# Altium PCB Main.PcbDoc
Units mm, origin at the board's own origin, x right, y up, seen from the top; angles counter-clockwise.
Board outline 152.4 x 101.6 mm, 2 copper layers (Top Layer, Bottom Layer); 69 components, 53 nets, 221 pads, 0 vias.
Unrouted connection lines stored in the file: 165.
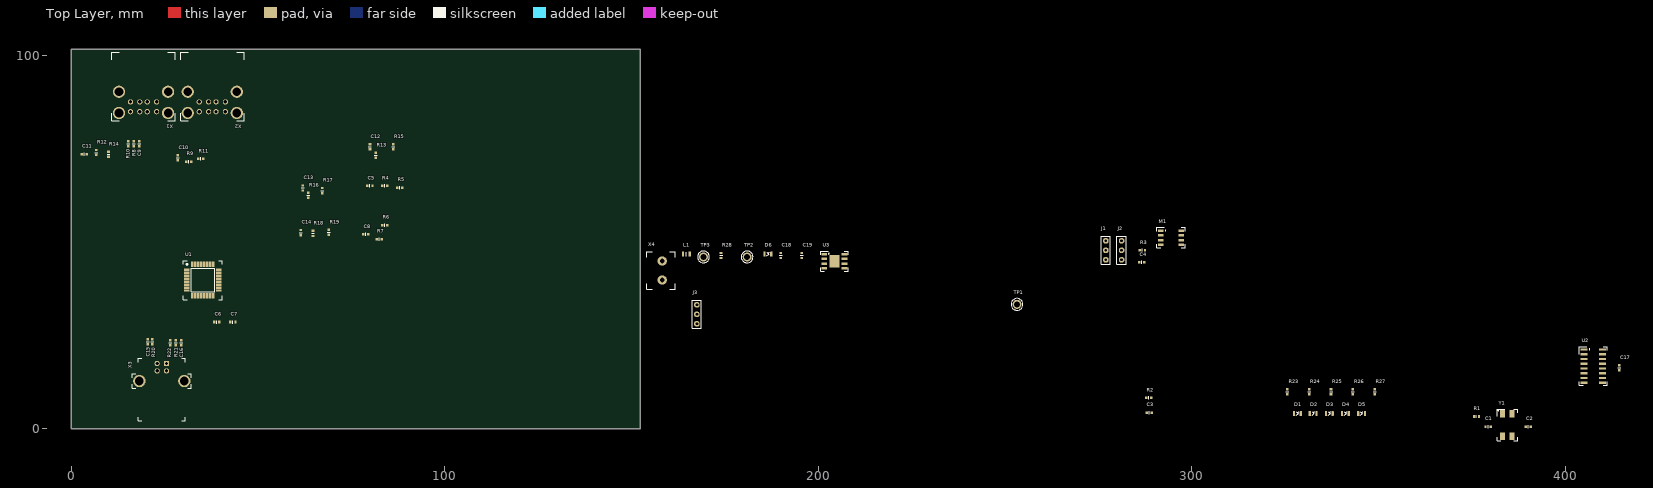
[diagram p0: Top Layer view]
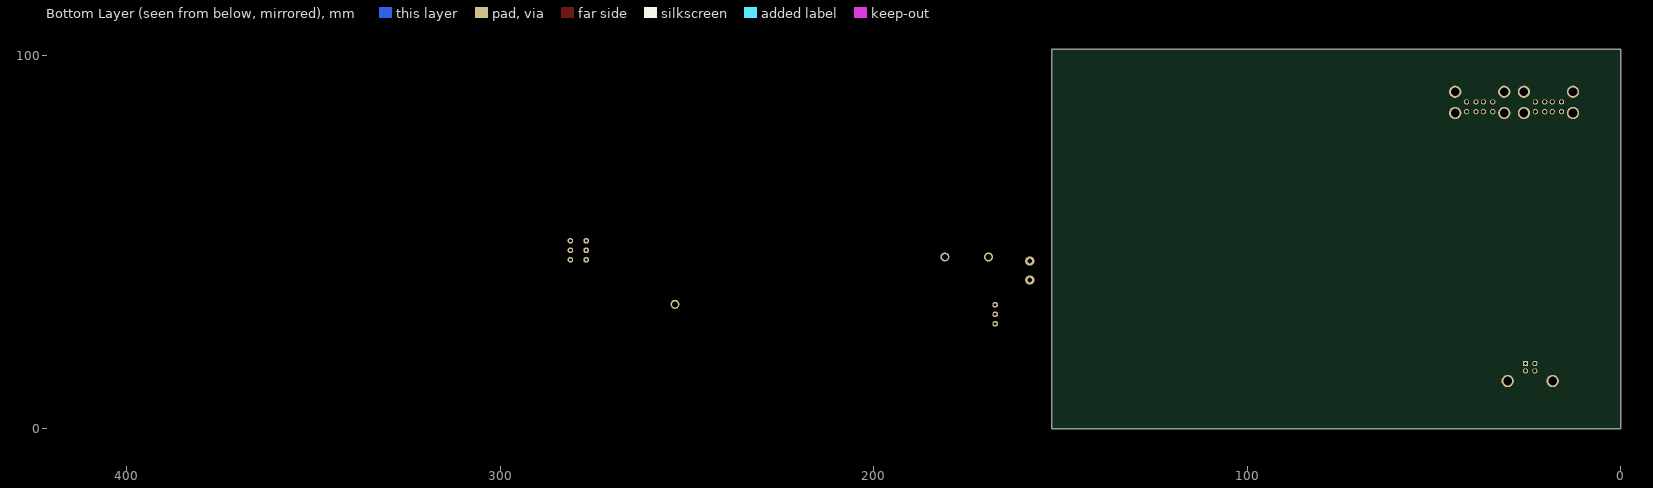
[diagram p1: Bottom Layer view, seen from below]

## Layer stack, top to bottom
Top Solder: solder mask 0.0102, Solder Resist, Dk 3.5
Top Layer: signal copper 0.0356
Dielectric 1: dielectric 0.32, FR-4, Dk 4.8
Bottom Layer: signal copper 0.0356
Bottom Solder: solder mask 0.0102, Solder Resist, Dk 3.5

## Board outline
0,0 152.4,0 152.4,101.6 0,101.6

## Design rules (kind name [scope] priority, off if disabled: settings)
BoardOutlineClearance [All] p1: gap=0.2 ignorepadtopadclearanceinfootprint=FALSE
Clearance "inPolygon Clearance" [InPolygon] p1: gap=0.3 ignorepadtopadclearanceinfootprint=TRUE // this rule ensures that every net within a polygon of a different net has a set clearance from the poly
Clearance "Different Diff Pair" [All] p2: gap=0.2 ignorepadtopadclearanceinfootprint=TRUE
Clearance "Same Diff Pair" [All] p3: gap=0.1 ignorepadtopadclearanceinfootprint=TRUE
Clearance "Different Nets" [not InAnyDifferentialPair] p4: gap=0.3 ignorepadtopadclearanceinfootprint=TRUE except(0.1: Arc-SMDPad Arc-THPad Arc-Via Arc-Text Track-SMDPad Track-THPad Track-Via Track-Text SMDPad-Text THPad-Text Via-Text Fill-Text Poly-Text Region-Text Text-Text; 0.12: Arc-Arc Arc-Track Track-Track; 0.15: SMDPad-SMDPad SMDPad-THPad SMDPad-Via THPad-THPad THPad-Via Via-Via; 0.2: Arc-Hole Track-Hole SMDPad-Hole THPad-Hole Via-Hole Fill-Hole Poly-Hole Region-Hole Text-Hole)
Clearance "Same Net" [not InAnyDifferentialPair] p5: gap=0 ignorepadtopadclearanceinfootprint=TRUE except(0.1: THPad-Via; 0.18: Arc-Arc Arc-Track Track-Track)
ComponentClearance [All] p1: gap=0.102 collisioncheckmode=3 verticalgap=0.102 showdistances=TRUE
DiffPairsRouting "Ethernet Routing" [InDifferentialPairClass('Ethernet_Pairs')] p1: maxlimit=0.2 minlimit=0.2 mostfreqgap=0.2 toplayer_minwidth=0.25 toplayer_maxwidth=0.25 toplayer_prefwidth=0.25 bottomlayer_minwidth=0.25 bottomlayer_maxwidth=0.25 bottomlayer_prefwidth=0.25 impedanceprofiledriven=TRUE maxuncoupledlength=12.7
DiffPairsRouting "USB Routing" [InDifferentialPairClass('USB_Pairs')] p2: maxlimit=0.127 minlimit=0.127 mostfreqgap=0.127 toplayer_minwidth=0.23 toplayer_maxwidth=0.23 toplayer_prefwidth=0.23 bottomlayer_minwidth=0.23 bottomlayer_maxwidth=0.23 bottomlayer_prefwidth=0.23 maxuncoupledlength=12.7
DiffPairsRouting "CAN Routing" [InDifferentialPairClass('CAN_Pairs')] p3: maxlimit=0.5 minlimit=0.5 mostfreqgap=0.5 toplayer_minwidth=0.201 toplayer_maxwidth=0.201 toplayer_prefwidth=0.201 bottomlayer_minwidth=0.201 bottomlayer_maxwidth=0.201 bottomlayer_prefwidth=0.201 impedanceprofiledriven=TRUE maxuncoupledlength=12.7
Height [All] p1: minheight=0 maxheight=1816.048 prefheight=12.7
HoleSize [All] p1: absolutevalues=TRUE maxlimit=6.3 minlimit=0.3 maxpercent=80.000 minpercent=20.000
HoleToHoleClearance [All] p1: gap=0.25 allowstackedmicrovias=FALSE
Length [All] p1: maxlimit=43.432 minlimit=0 usedelayunits=TRUE mindelay=0.000000 maxdelay=10000.000000
MatchedLengths "Diff Pair Matched Delays" [InDifferentialPairClass('Ethernet_Pairs') or InDifferentialPairClass('USB_Pairs') or InDifferentialPairClass('CAN_Pairs')] p1: tolerance=5 checknetsindiffpair=TRUE checkdiffpairvsdiffpair=FALSE checkxsignals=FALSE checkothers=FALSE usedelayunits=TRUE delaytolerance=100.000000
MinimumAnnularRing [All] p1: minimumring=0.2
MinimumSolderMaskSliver [All] p1: minsoldermaskwidth=0
PlaneClearance "Supply Net Clearance" [InNetClass('Supply_Nets')] p1: clearance=0.5
PlaneClearance "All Nets" [All] p2: clearance=0.3
PolygonConnect "Supply Nets" [InNetClass('Supply_Nets')] p1: connectstyle=Relief reliefconductorwidth=0.3 reliefentries=4 polygonreliefangle="90 Angle" conductorbypadedge=TRUE mindistance=0.381 enablemindistance=FALSE airgapwidth=0.254
PolygonConnect General [All] p2: connectstyle=Relief reliefconductorwidth=0.254 reliefentries=4 polygonreliefangle="90 Angle" airgapwidth=0.254
RoutingVias [All] p1: holewidth=0.2 width=0.35 viastyle="Through Hole" minholewidth=0.15 minwidth=0.3 maxholewidth=6.3 maxwidth=6.55
SilkToSilkClearance [All] p1: silktosilkclearance=0
SilkToSolderMaskClearance [All] p1: minsilkscreentomaskgap=0 clearancetoexposedcopper=TRUE
SolderMaskExpansion [All] p1: expansion=0.075 istentingtop=FALSE
SupplyNets "Schematic Supply Nets_3" [InNet('GND')] p1: voltage=0.000
SupplyNets "Schematic Supply Nets_2" [InNet('+5V')] p2: voltage=0.000
SupplyNets "Schematic Supply Nets_7" [InNet('+3V3')] p3: voltage=0.000
SupplyNets "Schematic Supply Nets_1" [InNet('Earth')] p4: voltage=0.000
UnRoutedNet [All] p1: checkbadconnections=TRUE
Width "nRF Width" [InNetClass('nRF Signal')] p1: maxlimit=0.379 minlimit=0.379 preferedwidth=0.379 impedanceprofiledriven=TRUE minimp=50.000000 maximp=50.000000 favimp=50.000000 checkconnectedcopper=TRUE
Width [All] p2: maxlimit=100 minlimit=0.1 preferedwidth=0.3
20 further rules are at their usual default settings.

## Classes and differential pairs
net class Supply_Nets: +3V3 +5V Earth GND
component class Regulator: C18 C19 D6 L1 Mount1 Mount2 Mount3 Mount4 R28 TP2 TP3 U3 X4
component class Main: C1 C2 C3 C4 C5 C6 C7 C8 C9 C10 C11 C12 C13 C14 C15 C16 C17 D1 D2 D3 D4 D5 J1 J2 J3 M1 R1 R2 R3 R4 R5 R6 R7 R8 R9 R10 R11 R12 R13 R14 R15 R16 R17 R18 R19 R20 R21 R22 R23 R24 R25 R26 R27 TP1 U1 U2 Y1
component class Connections: X1 X2 X3
differential pair USB4_DX: +USB4_DX_P -USB4_DX_N
differential pair USB4_D: +USB4_D_P -USB4_D_N
differential pair USB3_DX: +USB3_DX_P -USB3_DX_N
differential pair USB3_D: +USB3_D_P -USB3_D_N
differential pair USB2_DX: +USB2_DX_P -USB2_DX_N
differential pair USB2_D: +USB2_D_P -USB2_D_N
differential pair USB1_DX: +USB1_DX_P -USB1_DX_N
differential pair USB1_D: +USB1_D_P -USB1_D_N
differential pair USB0_DX: +USB0_DX_P -USB0_DX_N
differential pair USB0_D: +USB0_D_P -USB0_D_N

## Components (designator, comment, footprint, x,y, rotation, side; value= is the part's Value field where it differs from the comment)
C1 "[Cap] 0603 27pF 1% 50V" "[Cap] SMD 0603" 379.337,0.54 r0 top
C2 "[Cap] 0603 27pF 1% 50V" "[Cap] SMD 0603" 390.132,0.54 r0 top
C3 "[Cap] 0603 0.1uF 10% 16V" "[Cap] SMD 0603" 288.623,4.29 r0 top
C4 "[Cap] 0603 0.1uF 10% 16V" "[Cap] SMD 0603" 286.675,44.5 r0 top
C5 "[Cap] 0603 22pF 5% 50V" "[Cap] SMD 0603" 80,65 r0 top
C6 "[Cap] 0603 0.1uF 10% 16V" "[Cap] SMD 0603" 39.003,28.54 r0 top
C7 "[Cap] 0603 0.1uF 10% 16V" "[Cap] SMD 0603" 43.321,28.54 r0 top
C8 "[Cap] 0603 22pF 5% 50V" "[Cap] SMD 0603" 78.925,52 r0 top
C9 "[Cap] 0603 22pF 5% 50V" "[Cap] SMD 0603" 18.25,76.25 r270 top
C10 "[Cap] 0603 22pF 5% 50V" "[Cap] SMD 0603" 28.5,72.5 r90 top
C11 "[Cap] 0603 22pF 5% 50V" "[Cap] SMD 0603" 3.5,73.5 r0 top
C12 "[Cap] 0603 22pF 5% 50V" "[Cap] SMD 0603" 80,75.425 r90 top
C13 "[Cap] 0603 22pF 5% 50V" "[Cap] SMD 0603" 62,64.425 r90 top
C14 "[Cap] 0603 22pF 5% 50V" "[Cap] SMD 0603" 61.5,52.5 r90 top
C15 "[Cap] 0603 22pF 5% 50V" "[Cap] SMD 0603" 20.5,23.25 r90 top
C16 "[Cap] 0603 22pF 5% 50V" "[Cap] SMD 0603" 29.5,23 r90 top
C17 "[Cap] 0603 0.1uF 10% 16V" "[Cap] SMD 0603" 414.5,16.325 r90 top
C18 "[Cap] 0603 10uF 10% 10V" "[Cap] SMD 0603" 189.992,46.355 r90 top
C19 "[Cap] 0603 10uF 10% 10V" "[Cap] SMD 0603" 195.58,46.355 r90 top
D1 "[LED] SMD 0805 Red" "[LED] SMD 0805" 328.325,4.036 r0 top
D2 "[LED] SMD 0805 Green" "[LED] SMD 0805" 332.516,4.036 r0 top
D3 "[LED] SMD 0805 Green" "[LED] SMD 0805" 336.834,4.036 r0 top
D4 "[LED] SMD 0805 Green" "[LED] SMD 0805" 341.152,4.036 r0 top
D5 "[LED] SMD 0805 Green" "[LED] SMD 0805" 345.47,4.036 r0 top
D6 "[LED] SMD 0805 Green" "[LED] SMD 0805" 186.563,46.736 r0 top
J1 "[Jumper] Thru-Hole 3pin" "[Jumper] Thru-Hole 3pin" 277,47.75 r90 top
J2 "[Jumper] Thru-Hole 3pin" "[Jumper] Thru-Hole 3pin" 281.25,47.75 r90 top
J3 "[Jumper] Thru-Hole 3pin" "[Jumper] Thru-Hole 3pin" 167.513,30.607 r90 top
L1 "652-MH2029-300Y" "[Ferrite] SMD 0805" 164.719,46.736 r0 top
M1 "[Flash] 32x16b" "[Flash] 32x16b" 294.461,51.115 r0 top
R1 "[1k] SMD 0603 1% 1/10W" "[Res] SMD 0603" 376.25,3.25 r0 top
R2 "[47k] SMD 0603 1% 1/10W" "[Res] SMD 0603" 288.5,8.25 r0 top
R3 "[1k] SMD 0603 1% 1/10W" "[Res] SMD 0603" 286.825,47.75 r0 top
R4 "[27] SMD 0603 1% 1/10W" "[Res] SMD 0603" 83.925,65 r0 top
R5 "[15k] SMD 0603 1% 1/8W" "[Res] SMD 0603" 88,64.5 r0 top
R6 "[27] SMD 0603 1% 1/10W" "[Res] SMD 0603" 84,54.5 r0 top
R7 "[15k] SMD 0603 1% 1/8W" "[Res] SMD 0603" 82.5,50.75 r0 top
R8 "[27] SMD 0603 1% 1/10W" "[Res] SMD 0603" 16.75,76.25 r90 top
R9 "[27] SMD 0603 1% 1/10W" "[Res] SMD 0603" 31.5,71.5 r0 top
R10 "[15k] SMD 0603 1% 1/8W" "[Res] SMD 0603" 15.25,76.25 r90 top
R11 "[15k] SMD 0603 1% 1/8W" "[Res] SMD 0603" 34.675,72.25 r0 top
R12 "[27] SMD 0603 1% 1/10W" "[Res] SMD 0603" 6.75,73.925 r90 top
R13 "[27] SMD 0603 1% 1/10W" "[Res] SMD 0603" 81.5,73.175 r90 top
R14 "[15k] SMD 0603 1% 1/8W" "[Res] SMD 0603" 10,73.425 r90 top
R15 "[15k] SMD 0603 1% 1/8W" "[Res] SMD 0603" 86.25,75.5 r90 top
R16 "[27] SMD 0603 1% 1/10W" "[Res] SMD 0603" 63.5,62.5 r90 top
R17 "[15k] SMD 0603 1% 1/8W" "[Res] SMD 0603" 67.25,63.75 r90 top
R18 "[27] SMD 0603 1% 1/10W" "[Res] SMD 0603" 64.75,52.25 r90 top
R19 "[15k] SMD 0603 1% 1/8W" "[Res] SMD 0603" 69,52.575 r90 top
R20 "[27] SMD 0603 1% 1/10W" "[Res] SMD 0603" 21.75,23.25 r270 top
R21 "[27] SMD 0603 1% 1/10W" "[Res] SMD 0603" 28,23 r270 top
R22 "[1.5k] SMD 0603 1% 1/10W" "[Res] SMD 0603" 26.5,23 r270 top
R23 "[220] SMD 0603 1% 1/10W" "[Res] SMD 0603" 325.625,9.905 r90 top
R24 "[220] SMD 0603 1% 1/10W" "[Res] SMD 0603" 331.467,9.905 r90 top
R25 "[220] SMD 0603 1% 1/10W" "[Res] SMD 0603" 337.309,9.905 r90 top
R26 "[220] SMD 0603 1% 1/10W" "[Res] SMD 0603" 343.151,9.905 r90 top
R27 "[220] SMD 0603 1% 1/10W" "[Res] SMD 0603" 348.993,9.905 r90 top
R28 "[220] SMD 0603 1% 1/10W" "[Res] SMD 0603" 173.99,46.355 r90 top
TP1 "[THM] Thru-Hole" "[THM] White" 253.238,33.274 r0 top
TP2 "[THM] Thru-Hole" "[THM] White" 180.975,45.974 r0 top
TP3 "[THM] Thru-Hole" "[THM] White" 169.291,45.974 r0 top
U1 "4port" "[USB Hub] USB2.0 4port" 35.25,39.75 r0 top
U2 "[USB Power] 500mA 4port" "[IC] USB Hub Power Distribution" 407.5,16.75 r0 top
U3 "3V3 1.5A" "[Linear] 3V3 1.5A" 204.343,44.831 r0 top
X1 "USB-A" "[USB] Type-A Dual" 19.38,100.468 r180 top
X2 "USB-A" "[USB] Type-A Dual" 37.795,100.468 r180 top
X3 "USB-B" "[USB] Type-B" 24.27,17.45 r0 top
X4 "2pin Screw Terminal" "[Screw Terminal] 2pin 5mm" 158.242,42.291 r90 top
Y1 "[Crystal] SMD 6MHz" "[Crystal] SMD 6MHz" 384.5,1 r90 top

## Footprints (in the part's own frame and the unit in brackets; to place one, negate y for a bottom-side part, rotate by r counter-clockwise, add the part's x,y. Pads: shape width x height; smd on the part's side, far side on the other; paste and mask are expansions set on the pad)
"[Cap] SMD 0603" [mm]
  rect 0.65x0.7 smd: 1(-0.675,0) 2(0.675,0)
  silkscreen extent 0,-0.4 0,0.4, body extent -0.8,-0.45 0.8,0.45, height 0.8
"[Crystal] SMD 6MHz" [mm] "ECS-060-18-20BM-JEN-TR"
  rect 2x1.4 smd: 1(3,1.27) 2(-3,1.27) 3(-3,-1.27) 4(3,-1.27)
  silkscreen extent -4.25,-2.75 4.25,2.75, body extent -3.5,-2.5 3.5,2.5, height 1.3
"[Ferrite] SMD 0805" [mm]
  rect 0.6x1.25 smd: 1(-0.9,0) 2(0.9,0)
  silkscreen extent 0,-0.53 0,0.53, body extent -1,-0.6 1,0.6, height 1.1
"[Flash] 32x16b" [mm]
  rect 1.528x0.65 smd: 1(-2.711,1.905) 2(-2.711,0.635) 3(-2.711,-0.635) 4(-2.711,-1.905) 5(2.711,-1.905) 6(2.711,-0.635) 7(2.711,0.635) 8(2.711,1.905)
  silkscreen extent -3.8,-2.75 3.8,2.75, body extent -3.01,-2.45 3.01,2.45, height 1.63
"[IC] USB Hub Power Distribution" [mm]
  rrect25% 1.97x0.6 smd: 1(-2.475,4.445) 2(-2.475,3.175) 3(-2.475,1.905) 4(-2.475,0.635) 5(-2.475,-0.635) 6(-2.475,-1.905) 7(-2.475,-3.175) 8(-2.475,-4.445) 9(2.475,-4.445) 10(2.475,-3.175) 11(2.475,-1.905) 12(2.475,-0.635) 13(2.475,0.635) 14(2.475,1.905) 15(2.475,3.175) 16(2.475,4.445)
  silkscreen extent -3.71,-5.2 3.71,5.2, body extent -3,-4.95 3,4.95, height 1.75
"[Jumper] Thru-Hole 3pin" [mil]
  round 60 hole 30: 1(-100,0) 2(0,0) 3(100,0)
  silkscreen extent -149,-49 149,49, body extent -150,-50 150,50, height 374
"[LED] SMD 0805" [mm]
  rrect20% 0.6x1.25 smd: 1(-0.9,0) 2(0.9,0)
  silkscreen extent -0.28,-0.51 0.37,0.51, body extent -1,-0.65 1,0.65, height 0.8
"[Linear] 3V3 1.5A" [mm]
  rect 1.525x0.65 smd: 1(-2.688,1.905) 2(-2.688,0.635) 3(-2.688,-0.635) 4(-2.688,-1.905) 5(2.688,-1.905) 6(2.688,-0.635) 7(2.688,0.635) 8(2.688,1.905)
  rect 2.71x3.35 smd: 9(0,0)
  silkscreen extent -3.7,-2.73 3.7,2.73, body extent -3,-2.45 3,2.45, height 1.5
"[Res] SMD 0603" [mm]
  rect 0.65x0.7 smd: 1(-0.675,0) 2(0.675,0)
  silkscreen extent 0,-0.4 0,0.4, body extent -0.8,-0.45 0.8,0.45, height 0.8
"[Screw Terminal] 2pin 5mm" [mm]
  round 2.5 hole 1.3: 1(-2.5,0) 2(2.58,0)
  silkscreen extent -5.01,-3.5 5.09,4.1, body extent -5.45,-3.5 5.05,4.1, height 9.99
"[THM] White" [mm] "5012"
  round 2.4 hole 1.6: 1(0,0)
  silkscreen extent -1.59,-1.58 1.59,1.58, body extent -1.58,-1.59 1.58,1.59, height 8.12
"[USB Hub] USB2.0 4port" [mm]
  rect 1.475x0.6 smd: 1(-4.238,2.8) 2(-4.238,2) 3(-4.238,1.2) 4(-4.238,0.4) 5(-4.238,-0.4) 6(-4.238,-1.2) 7(-4.238,-2) 8(-4.238,-2.8) 17(4.238,-2.8) 18(4.238,-2) 19(4.238,-1.2) 20(4.238,-0.4) 21(4.238,0.4) 22(4.238,1.2) 23(4.238,2) 24(4.238,2.8)
  rect 0.6x1.475 smd: 9(-2.8,-4.238) 10(-2,-4.238) 11(-1.2,-4.238) 12(-0.4,-4.238) 13(0.4,-4.238) 14(1.2,-4.238) 15(2,-4.238) 16(2.8,-4.238) 25(2.8,4.238) 26(2,4.238) 27(1.2,4.238) 28(0.4,4.238) 29(-0.4,4.238) 30(-1.2,4.238) 31(-2,4.238) 32(-2.8,4.238)
  silkscreen extent -5.22,-5.22 5.23,5.23, body extent -4.5,-4.5 4.5,4.5, height 1.6
"[USB] Type-A Dual" [mm] "61400826021"
  round 1.4 hole 0.9: 1(-3.5,15.61) 2(-1,15.61) 3(1,15.61) 4(3.5,15.61) 5(-3.5,12.99) 6(-1,12.99) 7(1,12.99) 8(3.5,12.99)
  round 3.3 hole 2.3: MH(-6.57,10.28) MH(-6.57,15.96) MH(6.57,10.28) MH(6.57,15.96)
  silkscreen extent -8.5,-0.25 8.5,18, body extent -7.91,-0.08 7.91,17.07, height 16.19
"[USB] Type-B" [mm] "USB-B-S-F-B-TH"
  rect 1.408x1.408 hole 0.9: 1(1.25,0)
  round 1.408 hole 0.9: 2(-1.25,0) 3(-1.25,-2) 4(1.25,-2)
  round 3.316 hole 2.3: MH(-6.02,-4.7) MH(6.02,-4.7)
  silkscreen extent -7.93,-15.35 7.93,1.35, body extent -7.25,-15.1 7.25,1.4, height 10.7

## Part data
C1 C2: "0603N270F500CT", Capacitance=27pF, Max Voltage=50V, Size Package=0603, Supplier Part Number 1=1292-1510-1-ND, Tolerance=1%, Supplier 1=DigiKey
C3 C4 C6 C7 C17: "CC0603KRX7R7BB104", Capacitance=100nF, Max Voltage=16V, Size Package=0603, Supplier Part Number 1=311-1088-6-ND, Tolerance=10%, Supplier 1=DigiKey
C5 C8 C9 C10 C11 C12 C13 C14 C15 C16: "CC0603JRNPO9BN240", Capacitance=22pF, Max Voltage=50V, Size Package=0603, Supplier Part Number 1=311-1062-1-ND, Tolerance=5%, Supplier 1=DigiKey
C18 C19: "CL10A106KP8NNNC", Capacitance=10uF, Max Voltage=10V, Size Package=0603, Supplier Part Number 1=1276-1192-6-ND, Tolerance=10%, Supplier 1=DigiKey
D1: "LS R976-NR-1-0-20-R18", Color=Red, Size Package=0805, Supplier Part Number 1=475-LSR976-NR-1CT-ND, Supplier 1=DigiKey
D2 D3 D4 D5 D6: "LG R971-KN-1-0-20-R18", Color=Green, Size Package=0805, Supplier Part Number 1=475-LGR971-KN-1CT-ND, Supplier 1=DigiKey
L1: library part "[Ferrite] SMD 0805 3A 30ohm", Res @ Freq="30 @ 100MHz", Size Package=0805, Supplier Part Number 1=MH2029-300YCT-ND, Supplier 1=DigiKey
M1: "M93C46-WMN6TP", Supplier Part Number 1=497-5090-1-ND, Supplier 1=DigiKey
R1 R3: "RMCF0603FT1K00", Resistance=1k, Size Package=0603, Supplier Part Number 1=RMCF0603FT1K00DKR-ND, Tolerance=1%, Supplier 1=DigiKey, Wattage=1/10W
R2: "RC0603FR-0747KL", Resistance=47k, Size Package=0603, Supplier Part Number 1=311-47.0KHRDKR-ND, Tolerance=1%, Supplier 1=DigiKey, Wattage=1/10W
R4 R6 R8 R9 R12 R13 R16 R18 R20 R21: "MCT06030C2709FP500", Resistance=27, Size Package=0603, Supplier Part Number 1=749-1631-1-ND, Tolerance=1%, Supplier 1=DigiKey, Wattage=1/10W
R5 R7 R10 R11 R14 R15 R17 R19: "CRCW060315K0FKEA", Resistance=15k, Size Package=0603, Supplier Part Number 1=541-15.0KHCT-ND, Tolerance=1%, Supplier 1=DigiKey, Wattage=1/8W
R22: "CR0603-FX-1501ELF", Resistance=1.5k, Size Package=0603, Supplier Part Number 1=118-CR0603-FX-1501ELFCT-ND, Tolerance=1%, Supplier 1=DigiKey, Wattage=1/10W
R23 R24 R25 R26 R27 R28: "CRGCQ0805F220R", Resistance=220, Size Package=0603, Supplier Part Number 1=A129741CT-ND, Tolerance=1%, Supplier 1=DigiKey, Wattage=1/8W
TP1 TP2 TP3: "5012", Supplier Part Number 1=36-5012-ND, Supplier 1=DigiKey
U1: library part "[USB Hub] USB 2.0 4port", "TUSB2046BVFR", Supplier Part Number 1=296-27131-1-ND, Supplier 1=DigiKey
U2: "TPS2044BDR", Supplier Part Number 1=296-26909-6-ND, Supplier 1=DigiKey
U3: library part "[Linear] 3V3 1.5A", "AP7362A-33SP-13", Supplier Part Number 1=AP7362A-33SP-13DICT-ND, Supplier 1=DigiKey
X1 X2: library part "[USB] Type-A Dual", "61400826021", Supplier Part Number 1=732-2107-ND, Supplier 1=DigiKey
X3: library part "[USB] Type-B", "USB-B-S-F-B-TH", Supplier Part Number 1=SAM10867-ND, Supplier 1=DigiKey
X4: library part "[Screw Terminal] 2pin", "TB002-500-02BE", Supplier Part Number 1=102-6145-ND, Supplier 1=DigiKey
Y1: "ECS-060-18-20BM-JEN-TR", Supplier Part Number 1=XC2349DKR-ND, Supplier 1=DigiKey

## Nets (pads, with @x,y where several pads share a name; then routed paths per layer and width w, separated by ;. In a path a pad name is that pad's centre, name@x,y a point inside that pad or via, vN(x,y) a via of type N, cw(c..) or ccw(c..) an arc to the next point about the centre after c; other vN are vias at no path point)
+3V3: C4.2 C6.2 C7.2 C19.2 J1.3 J3.3 M1.6 M1.8 R2.1 R22.1 R23.2 R24.2 R25.2 R26.2 R27.2 R28.1 TP2.1 U1.3 U1.25 U3.5 U3.6 U3.7
+5V: C17.2 C18.2 U2.2 U2.6 U3.2 U3.3 U3.4 X4.1
\USB1_EN: D2.2 U1.9 U2.3
\USB1_OC: U1.10 U2.16
\USB2_EN: D3.2 U1.13 U2.4
\USB2_OC: U1.14 U2.13
\USB3_EN: D4.2 U1.17 U2.7
\USB3_OC: U1.18 U2.12
\USB4_EN: D5.2 U1.21 U2.8
\USB4_OC: U1.22 U2.9
Earth: L1.1 X1.MH X2.MH X3.MH
EECLK: M1.2 U1.5
EEDATA: J2.2 U1.6
GND: C1.1 C2.1 C3.1 C4.1 C5.1 C6.1 C7.1 C8.1 C9.1 C10.1 C11.1 C12.1 C13.1 C14.1 C15.1 C16.1 C17.1 C18.1 C19.1 D6.2 J1.1 J3.1 L1.2 M1.5 R5.1 R7.1 R10.1 R11.1 R14.1 R15.1 R17.1 R19.1 TP3.1 U1.7 U1.8 U1.27 U1.28 U1.31 U2.1 U2.5 U3.1 U3.9 X1.4 X1.8 X2.4 X2.8 X3.4 X4.2 Y1.2 Y1.4
NetC2_2: C2.2 R1.1 Y1.3
NetD1_1: D1.1 R23.1
NetD2_1: D2.1 R24.1
NetD3_1: D3.1 R25.1
NetD4_1: D4.1 R26.1
NetD5_1: D5.1 R27.1
NetD6_1: D6.1 R28.2
NetJ1_2: J1.2 J2.3
NetJ2_1: J2.1 M1.3 R3.2
NetJ3_2: J3.2 U1.26
NetM1_4: M1.4 R3.1
SUSPND: D1.2 U1.32
USB0_D_N: R20.2 X3.2
USB0_D_P: R21.2 R22.2 X3.3
USB0_DX_N: C15.2 R20.1 U1.2
USB0_DX_P: C16.2 R21.1 U1.1
USB1_D_N: R8.2 R10.2 X1.2
USB1_D_P: R12.2 R14.2 X1.3
USB1_DX_N: C9.2 R8.1 U1.11
USB1_DX_P: C11.2 R12.1 U1.12
USB1_VOUT: U2.15 X1.1
USB2_D_N: R16.2 R17.2 X1.6
USB2_D_P: R18.2 R19.2 X1.7
USB2_DX_N: C13.2 R16.1 U1.15
USB2_DX_P: C14.2 R18.1 U1.16
USB2_VOUT: U2.14 X1.5
USB3_D_N: R9.2 R11.2 X2.2
USB3_D_P: R13.2 R15.2 X2.3
USB3_DX_N: C10.2 R9.1 U1.19
USB3_DX_P: C12.2 R13.1 U1.20
USB3_VOUT: U2.11 X2.1
USB4_D_N: R4.2 R5.2 X2.6
USB4_D_P: R6.2 R7.2 X2.7
USB4_DX_N: C5.2 R4.1 U1.23
USB4_DX_P: C8.2 R6.1 U1.24
USB4_VOUT: U2.10 X2.5
"USB XTAL 1": C1.2 U1.30 Y1.1
"USB XTAL 2": R1.2 U1.29
USB-Reset: C3.2 M1.1 R2.2 TP1.1 U1.4
pads on no net: M1.7 U3.8 X3.1